# Altium PCB S5161 V1.1B.PcbDoc
Units mil, origin at the board's own origin, x right, y up, seen from the top; angles counter-clockwise.
Board outline 601 x 800 mil, 4 copper layers (Top, GND, VM, Bottom), stack 30.534 mil thick; 30 components, 38 nets, 118 pads, 60 vias.
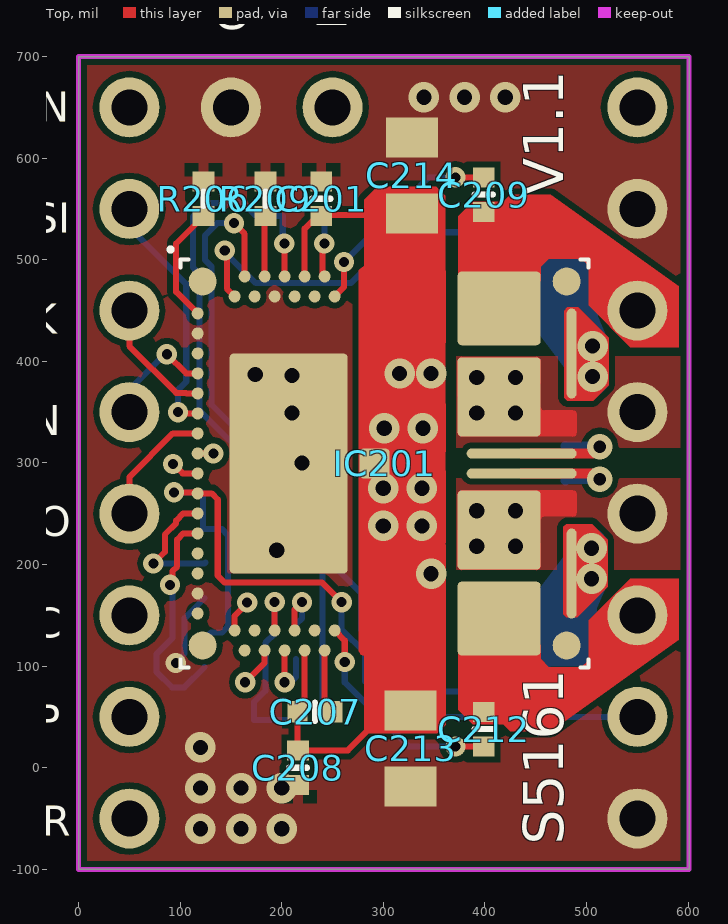
[diagram p0: Top view]
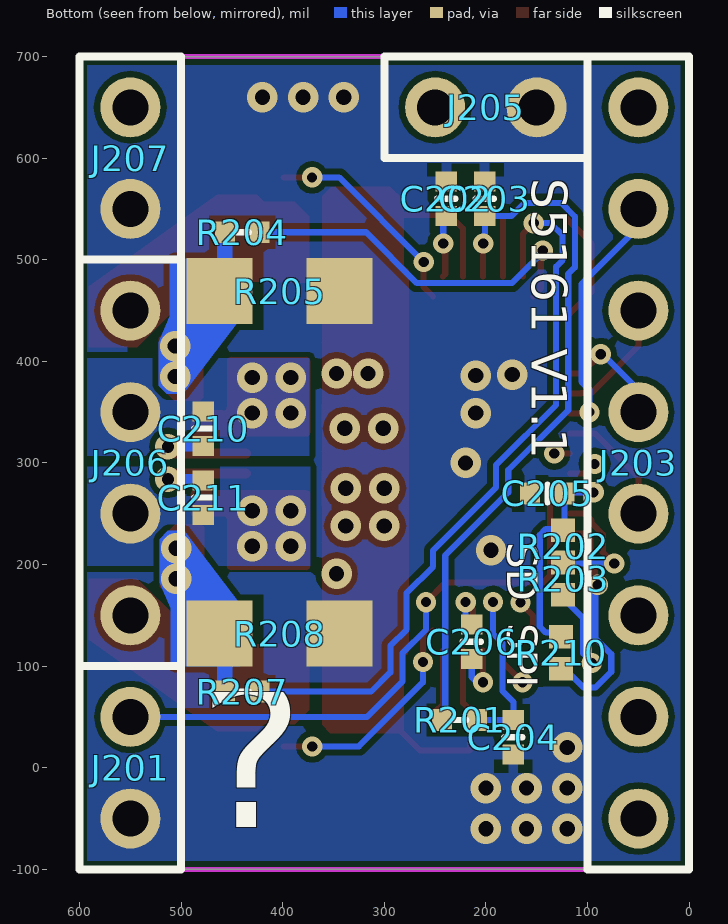
[diagram p1: Bottom view, seen from below]
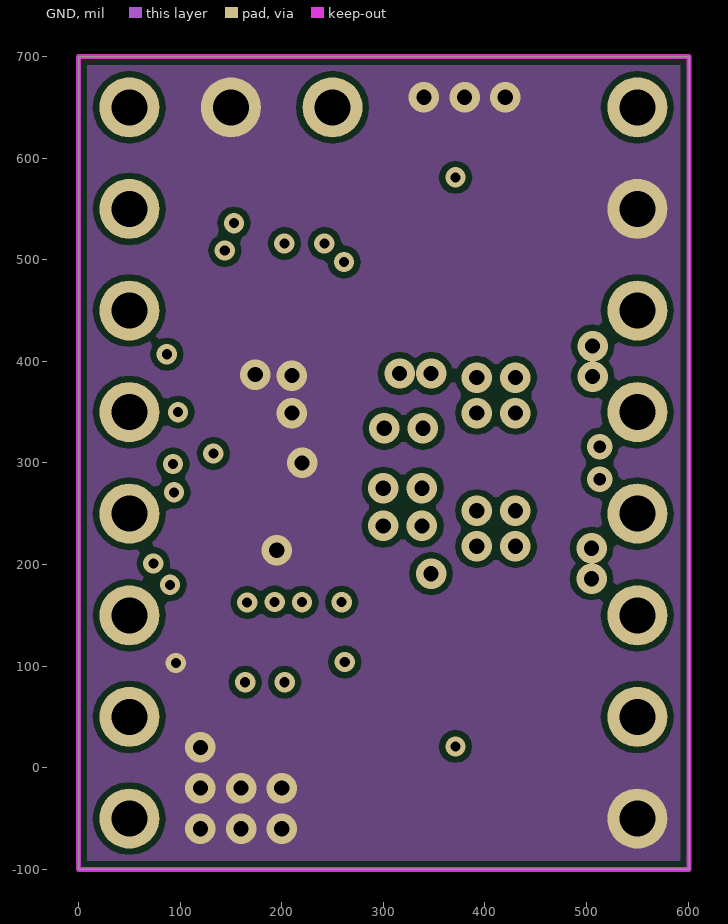
[diagram p2: GND]
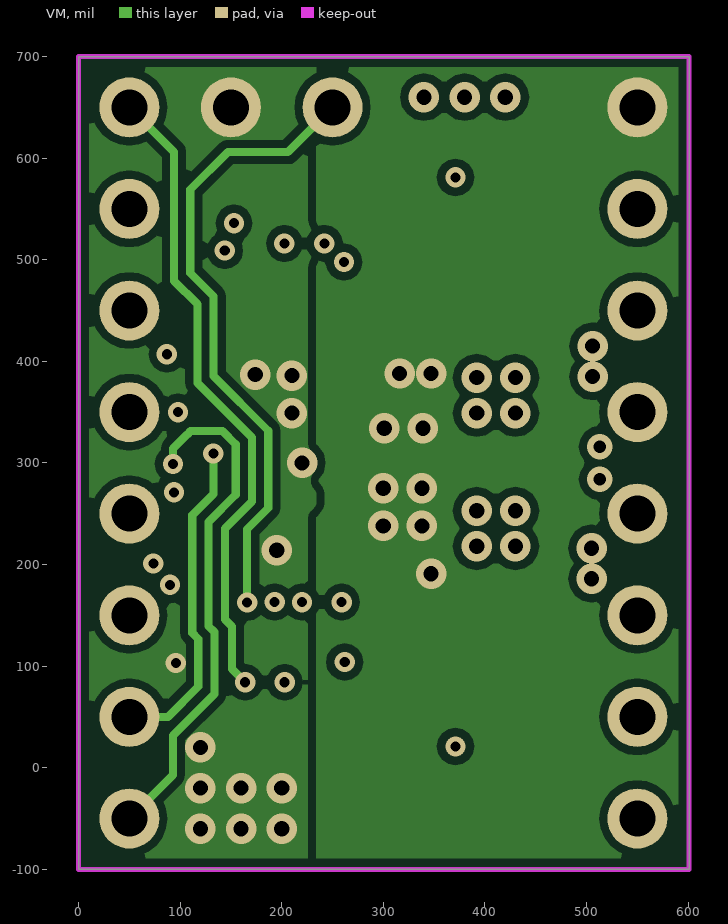
[diagram p3: VM]
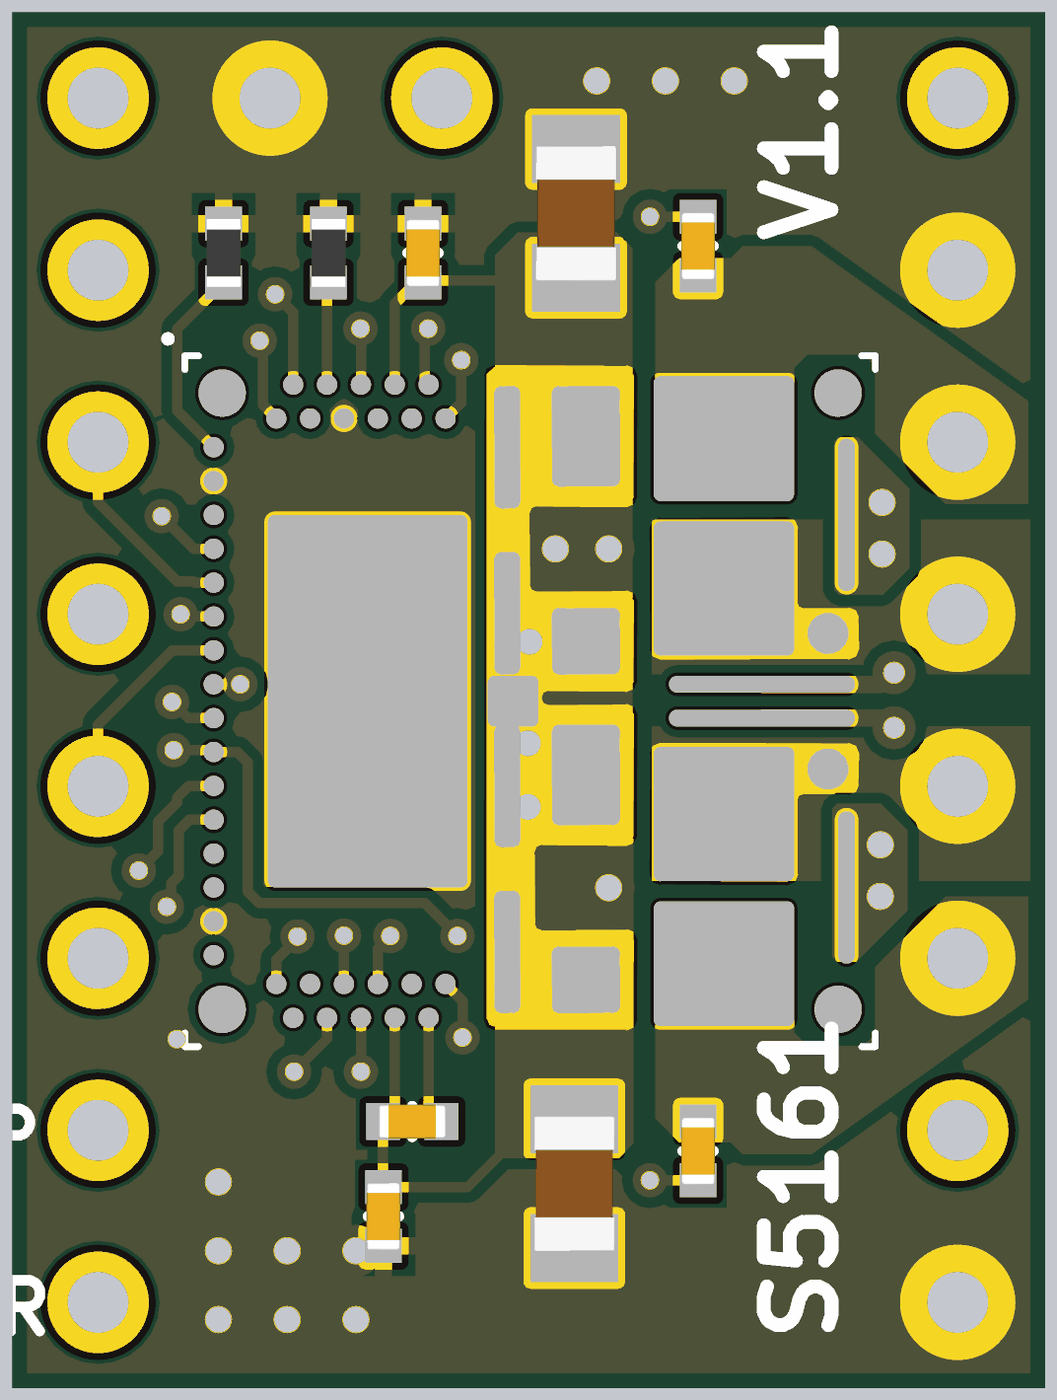
[diagram p4: 3D render of the assembled board from above, using the file's embedded part models]
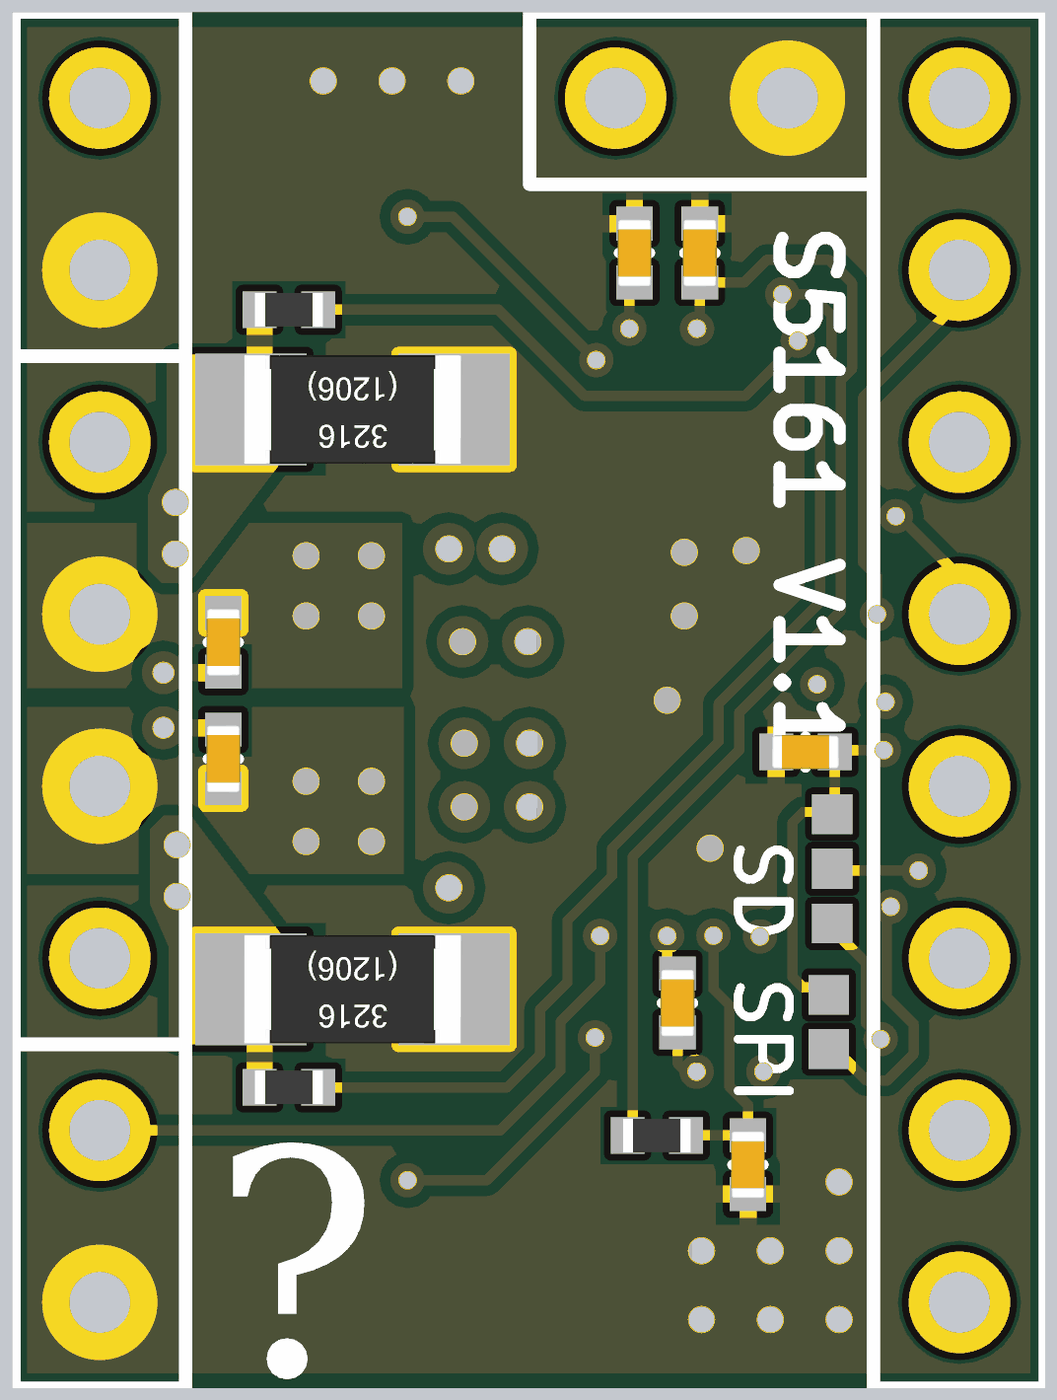
[diagram p5: 3D render of the assembled board from below, using the file's embedded part models]

## Layer stack, top to bottom
Solder Mask Top: solder mask 0.4, Solder Resist, Dk 3.5
Top: signal copper 1.35
Dielectric 1: core 10, FR-4, Dk 4.2
GND: signal copper 1.417
Dielectric 3: prepreg 5, Dk 4.2
VM: signal copper 1.417
Dielectric 2: core 10, Dk 4.2
Bottom: signal copper 1.35
Solder Mask Bottom: solder mask 0.4, Solder Resist, Dk 3.5

## Board outline
0,-100 601,-100 601,700 0,700

## Design rules (kind name [scope] priority, off if disabled: settings)
Clearance Clearance_1 [OnLayer('VM')] p1: gap=8 ignorepadtopadclearanceinfootprint=TRUE
Clearance [All] p2: gap=6 ignorepadtopadclearanceinfootprint=TRUE
ComponentClearance "ComponentClearance - Default - DEFAULT" [All] p1: gap=7.87 collisioncheckmode=3 verticalgap=10 showdistances=FALSE
FanoutControl Fanout_Small [(CompPinCount < 5)] p2: bgadir=Out bgaviamode=Centered fanoutstyle=Auto fanoutdirection=OutThenIn viagrid=1 // Fanout_Small (Default Rule)
FanoutControl Fanout_LCC [IsLCC] p4: bgadir=Out bgaviamode=Centered fanoutstyle=Auto fanoutdirection=Alternating viagrid=1 // Fanout_LCC (Default Rule)
HoleToHoleClearance "HoleToHoleClearance - Default - DEFAULT" [All] p1: gap=7.87 allowstackedmicrovias=TRUE
Length "Default Length" [All] p1: maxlimit=50000 minlimit=0
MaxMinImpedance "Default Impedance" [All] p1: minimum=50.00 maximum=150.0
ParallelSegment "Default Parallel Segment Same Layer" [All] p1: limit=1000 gap=200
ParallelSegment "Default Parallel Segment Adjasent" [All] p2: limit=1000 gap=200
PlaneClearance "PlaneClearance - FootPrint 'HEADER-1X2_V_2.54AA'" [HasFootprint('HEADER-1X2_V_2.54AA')] p1: clearance=19.68 // PAD - Power Plane Clearance
PlaneClearance "PlaneClearance - FootPrint 'HEADER-1X2_V_2.54A'" [HasFootprint('HEADER-1X2_V_2.54A')] p2: clearance=19.68 // PAD - Power Plane Clearance
PlaneClearance "PlaneClearance - FootPrint 'HEADER-1X2_V_2.54'" [HasFootprint('HEADER-1X2_V_2.54')] p3: clearance=19.68 // PAD - Power Plane Clearance
PlaneClearance "PlaneClearance - FootPrint 'HEADER-1X5_V_2.54'" [HasFootprint('HEADER-1X5_V_2.54')] p4: clearance=19.68 // PAD - Power Plane Clearance
PlaneClearance "PlaneClearance - FootPrint 'HEADER-1X4_V_2.54'" [HasFootprint('HEADER-1X4_V_2.54')] p5: clearance=19.68 // PAD - Power Plane Clearance
PlaneClearance "PlaneClearance - FootPrint 'HEADER-1X3_V_2.54'" [HasFootprint('HEADER-1X3_V_2.54')] p6: clearance=19.68 // PAD - Power Plane Clearance
PlaneConnect "PlaneConnect - FootPrint 'HEADER-1X5_V_2.54'" [HasFootprint('HEADER-1X5_V_2.54')] p1: planeconnectstyle=Direct reliefexpansion=7.87 reliefentries=4 reliefconductorwidth=11.81 reliefairgap=11.81
PlaneConnect "PlaneConnect - FootPrint 'HEADER-1X2_V_2.54A'" [HasFootprint('HEADER-1X2_V_2.54A')] p2: planeconnectstyle=Direct reliefexpansion=7.87 reliefentries=4 reliefconductorwidth=11.81 reliefairgap=0
PlaneConnect "PlaneConnect - FootPrint 'HEADER-1X2_V_2.54'" [HasFootprint('HEADER-1X2_V_2.54')] p3: planeconnectstyle=Direct reliefexpansion=7.87 reliefentries=4 reliefconductorwidth=11.81 reliefairgap=11.81
PlaneConnect "PlaneConnect - FootPrint 'HEADER-1X2_V_2.54AA'" [HasFootprint('HEADER-1X2_V_2.54AA')] p4: planeconnectstyle=Direct reliefexpansion=15.75 reliefentries=4 reliefconductorwidth=11.81 reliefairgap=0
PlaneConnect "PlaneConnect - FootPrint 'HEADER-1X4_V_2.54'" [HasFootprint('HEADER-1X4_V_2.54')] p5: planeconnectstyle=Direct reliefexpansion=15.75 reliefentries=4 reliefconductorwidth=11.81 reliefairgap=11.81
PlaneConnect "PlaneConnect - FootPrint 'HEADER-1X3_V_2.54'" [HasFootprint('HEADER-1X3_V_2.54')] p6: planeconnectstyle=Direct reliefexpansion=15.75 reliefentries=4 reliefconductorwidth=11.81 reliefairgap=11.81
PlaneConnect "Default PlaneConnect" [All] p7: planeconnectstyle=Direct reliefexpansion=20 reliefentries=4 reliefconductorwidth=7.87 reliefairgap=10
PolygonConnect PolygonConnect_3 [HasFootprint('RES0402_NS')] p1: connectstyle=Relief reliefconductorwidth=10 reliefentries=4 polygonreliefangle="90 Angle" airgapwidth=8
PolygonConnect PolygonConnect_2 [InNet('B2')] p2: connectstyle=Direct reliefconductorwidth=10 reliefentries=4 polygonreliefangle="90 Angle" airgapwidth=10
PolygonConnect PolygonConnect_1 [InNet('A1')] p3: connectstyle=Direct reliefconductorwidth=10 reliefentries=4 polygonreliefangle="90 Angle" airgapwidth=10
PolygonConnect [HasFootprint('CAP0402_NS')] p4: connectstyle=Relief reliefconductorwidth=10 reliefentries=4 polygonreliefangle="90 Angle" airgapwidth=8
PolygonConnect "PolygonConnect - FootPrint 'HEADER-1X5_V_2.54'" [HasFootprint('HEADER-1X5_V_2.54')] p5: connectstyle=Relief reliefconductorwidth=11.81 reliefentries=4 polygonreliefangle="45 Angle" airgapwidth=11.81
PolygonConnect "PolygonConnect - FootPrint 'HEADER-1X2_V_2.54A'" [HasFootprint('HEADER-1X2_V_2.54A')] p6: connectstyle=Direct reliefconductorwidth=11.81 reliefentries=4 polygonreliefangle="45 Angle" airgapwidth=10
PolygonConnect "PolygonConnect - FootPrint 'HEADER-1X2_V_2.54'" [HasFootprint('HEADER-1X2_V_2.54')] p7: connectstyle=Relief reliefconductorwidth=11.81 reliefentries=4 polygonreliefangle="45 Angle" airgapwidth=11.81
PolygonConnect "PolygonConnect - Default SMT" [IsSMTPin] p8: connectstyle=Direct reliefconductorwidth=7.87 reliefentries=4 polygonreliefangle="45 Angle" airgapwidth=10
PolygonConnect "PolygonConnect - FootPrint 'HEADER-1X4_V_2.54'" [HasFootprint('HEADER-1X4_V_2.54')] p9: connectstyle=Direct reliefconductorwidth=11.81 reliefentries=4 polygonreliefangle="45 Angle" airgapwidth=11.81
PolygonConnect "PolygonConnect - FootPrint 'HEADER-1X3_V_2.54'" [HasFootprint('HEADER-1X3_V_2.54')] p10: connectstyle=Relief reliefconductorwidth=11.81 reliefentries=4 polygonreliefangle="45 Angle" airgapwidth=11.81
PolygonConnect "PolygonConnect - FootPrint 'HEADER-1X2_V_2.54AA'" [HasFootprint('HEADER-1X2_V_2.54AA')] p11: connectstyle=Direct reliefconductorwidth=11.81 reliefentries=4 polygonreliefangle="45 Angle" airgapwidth=10
PolygonConnect "PolygonConnect - Default Pad" [All] p12: connectstyle=Direct reliefconductorwidth=7.87 reliefentries=4 polygonreliefangle="45 Angle" airgapwidth=10
RoutingLayers "RoutingLayers - Default - DEFAULT" [All] p1: top layer_v5=TRUE mid layer 1_v5=TRUE mid layer 2_v5=TRUE bottom layer_v5=TRUE
RoutingPriority "RoutingPriority - Default - DEFAULT" [All] p1: routingpriority=3
RoutingTopology "Default Routing Topology" [All] p1: topology=Shortest
RoutingVias "RoutingVias - Default - DEFAULT" [All] p1: holewidth=10 width=20 viastyle="Through Hole" minholewidth=10 minwidth=20 maxholewidth=20 maxwidth=40
SMDToCorner "SMDToCorner - Default - DEFAULT" [All] p1: distance=78740
SolderMaskExpansion [All] p1: expansion=4
Width [All] p1: maxlimit=100 minlimit=5 preferedwidth=6
21 further rules are at their usual default settings.

## Classes and differential pairs
net class ClearanceClass_2(RuleSet): +VM A1 A2 B1 B2 CA1 CA2 CB1 CB2 CPI CPO VCP

## Components (designator, comment, footprint, x,y, rotation, side; value= is the part's Value field where it differs from the comment)
C201 "C0805" CAP0402_NS 239,560 r270 top
C202 "C0603" CAP0402_NS 239,560 r270 bottom
C203 "C0603" CAP0402_NS 201,560 r270 bottom
C204 "C0603" CAP0402_NS 173,30 r90 bottom
C205 "C0603" CAP0402_NS 139.55,269.92 r180 bottom
C206 "C0603" CAP0402_NS 214,124 r270 bottom
C207 "C0805" CAP0402_NS 232.78,55.12 r0 top
C208 "C0805" CAP0402_NS 216,0 r90 top
C209 "C0603" CAP0402_NS 399,564 r90 top
C210 "C0603" CAP0402_NS 478.16,333.69 r270 bottom
C211 "C0603" CAP0402_NS 478.16,265.88 r90 bottom
C212 "C0603" CAP0402_NS 399,38 r270 top
C213 "C1210" CAP0805 327,19 r90 top
C214 "C1210" CAP0805 328,583 r270 top
IC201 "QFN42L" QFN42L 301.3,299.45 r270 top locked
J201 "HEADER-1X2_V_2.54A" HDR1X2 550,50 r270 bottom locked
J203 "HEADER-1X5_V_2.54" HDR1X8 50,650 r270 bottom locked
J205 "HEADER-1X2_V_2.54" HDR1X2 150,650 r0 bottom locked
J206 "HEADER-1X4_V_2.54" HDR1X4 550,450 r270 bottom locked
J207 "HEADER-1X2_V_2.54A" HDR1X2 550,650 r270 bottom locked
R201 "R0603" RES0402_NS 226,47 r0 bottom
R202 "R0603" JUMPER_0402_NS 124,218 r90 bottom
R203 "R0603" JUMPER_0402_NS 124,186 r90 bottom
R204 "R0603" RES0402_NS 440,527 r180 bottom
R205 "R2512" R1206 403,469 r0 bottom
R206 "R0603" RES0402_NS 123,560 r270 top
R207 "R0603" RES0402_NS 440,75 r180 bottom
R208 "R2512" R1206 403,132 r0 bottom
R209 "R0603" RES0402_NS 184,560 r270 top
R210 "R0603" JUMPER_0402_NS 126,113 r90 bottom

## Footprints (in the part's own frame and the unit in brackets; to place one, negate y for a bottom-side part, rotate by r counter-clockwise, add the part's x,y. Pads: shape width x height; smd on the part's side, far side on the other; paste and mask are expansions set on the pad)
CAP0402_NS [mm]
  rect 0.5x0.54 smd: 1(-0.433,0) 2(0.433,0)
  silkscreen extent 0,-0.23 0,0.23, body extent -0.5,-0.25 0.5,0.25, height 0.5
CAP0805 [mm]
  rect 1x1.3 smd: 1(-0.95,0) 2(0.95,0)
  body extent -1,-0.6 1,0.6, height 1.2
HDR1X2 [mm] "Connector; Header; 2 Position"
  round 1.5 hole 0.9: 1(0,0) 2(2.54,0)
  silkscreen extent -1.27,-1.27 3.81,1.27
HDR1X4 [mm] "Connector; Header; 4 Position"
  round 1.5 hole 0.9: 1(0,0) 2(2.54,0) 3(5.08,0) 4(7.62,0)
  silkscreen extent -1.27,-1.27 8.89,1.27
HDR1X8 [mm] "Connector; Header; 8 Position"
  round 1.5 hole 0.9: 1(0,0) 2(2.54,0) 3(5.08,0) 4(7.62,0) 5(10.16,0) 6(12.7,0) 7(15.24,0) 8(17.78,0)
  silkscreen extent -1.27,-1.27 19.05,1.27
JUMPER_0402_NS [mm]
  rect 0.584x0.6 smd: 1(-0.4,0) 2(0.4,0)
QFN42L [mm]
  round 0.3 smd mask+0.05: 1(-4.175,-1.25) 2(-4.675,-1.5) 3(-4.175,-1.75) 4(-4.675,-2) 5(-4.175,-2.25) 6(-4.675,-2.5) 7(-4.175,-2.75) 8(-4.675,-3) 9(-4.175,-3.25) 10(-4.675,-3.5) 11(-4.175,-3.75) 12(-3.75,-4.675) 13(-3.25,-4.675) 14(-2.75,-4.675) 15(-2.25,-4.675) 16(-1.75,-4.675) 17(-1.25,-4.675) 18(-0.75,-4.675) 19(-0.25,-4.675) 20(0.25,-4.675) 21(0.75,-4.675) 22(1.25,-4.675) 23(1.75,-4.675) 24(2.25,-4.675) 25(2.75,-4.675) 26(3.25,-4.675) 27(3.75,-4.675) 28(4.175,-3.75) 29(4.675,-3.5) 30(4.175,-3.25) 31(4.675,-3) 32(4.175,-2.75) 33(4.675,-2.5) 34(4.175,-2.25) 35(4.675,-2) 36(4.175,-1.75) 37(4.675,-1.5) 38(4.175,-1.25)
  rrect100% 0.25x2.75 smd mask+0.05: CA1(0.25,3.425) CB2(-0.25,3.425)
  rrect7% 5.5x2.95 smd mask+0.05: GNDP(0,-2.4)
  rrect10% 1.98x2.075 smd mask+0.05: OA1(1.665,2.863) OB2(-1.665,2.863)
  rrect11% 1.845x2.075 smd mask+0.05: OA2(3.878,2.863) OB1(-3.878,2.863)
  rrect100% 2.25x0.25 smd mask+0.05: RSA(2.75,4.675) RSB(-2.75,4.675)
  rrect27% 0.75x0.75 smd mask+0.05: VM(0,-0.25)
  round 0.7 smd mask+0.05: X1(-4.55,4.55) X2(-4.55,-4.55) X3(4.55,-4.55) X4(4.55,4.55)
  Top region: 4.808,1.425 4.777,1.502 4.7,1.533 4.7,1.525 3.525,1.533 3.448,1.502 3.417,1.425 3.425,1.425 3.433,0.125 3.402,0.048 3.325,0.017 3.325,0.025 2.175,0.017 2.098,0.048 2.067,0.125 2.075,0.125 2.083,1.425 2.052,1.502 1.975,1.533 1.975,1.525 0.2,1.533 0.123,1.502 0.092,1.425 0.1,1.425 0.108,0.225 0.077,0.148 0,0.117 0,0.125 -0.1,0.117 -0.177,0.148 -0.208,0.225 -0.2,0.225 -0.192,1.425 -0.223,1.502 -0.3,1.533 -0.3,1.525 -1.475,1.533 -1.552,1.502 -1.583,1.425 -1.575,1.425 -1.567,0.05 -1.598,-0.027 -1.675,-0.058 -1.675,-0.05 -2.825,-0.058 -2.902,-0.027 -2.933,0.05 -2.925,0.05 -2.917,1.425 -2.948,1.502 -3.025,1.533 -3.025,1.525 -4.8,1.533 -4.877,1.502 -4.908,1.425 -4.9,1.425 -4.908,-0.525 -4.877,-0.602 -4.8,-0.633 -4.8,-0.625 4.7,-0.633 4.777,-0.602 4.808,-0.525 4.8,-0.525 4.8,1.425
  Top region: -1.333,4.7 -1.302,4.777 -1.225,4.808 -1.225,4.8 -0.775,4.808 -0.698,4.777 -0.667,4.7 -0.675,4.7 -0.667,1.925 -0.698,1.848 -0.775,1.817 -0.775,1.825 -2.555,1.817 -2.632,1.848 -2.663,1.925 -2.655,1.925 -2.663,3.8 -2.632,3.877 -2.555,3.908 -2.555,3.9 -1.425,3.892 -1.348,3.923 -1.317,4 -1.325,4 -1.325,4.7
  Top region: 1.333,4.7 1.302,4.777 1.225,4.808 1.225,4.8 0.775,4.808 0.698,4.777 0.667,4.7 0.675,4.7 0.667,1.925 0.698,1.848 0.775,1.817 0.775,1.825 2.555,1.817 2.632,1.848 2.663,1.925 2.655,1.925 2.663,3.8 2.632,3.877 2.555,3.908 2.555,3.9 1.425,3.892 1.348,3.923 1.317,4 1.325,4 1.325,4.7
  silkscreen extent -5.4,-5.4 5.1,5.1, body extent -5,-4.98 5,5, height 0.8
R1206 [mil]
  rect 65x65 smd: 1(-59.06,0) 2(59.06,0)
  body extent -63,-31 63,31, height 22
RES0402_NS [mm]
  rect 0.5x0.54 smd: 1(-0.433,0) 2(0.433,0)
  silkscreen extent -0.18,0 0.18,0, body extent -0.5,-0.25 0.5,0.25, height 0.5

## Via types
v1: diameter 30, hole 15, Top to Bottom, tented both sides, 36 vias
v2: diameter 20, hole 10, Top to Bottom, tented both sides, 22 vias
v3: diameter 25, hole 12, Top to Bottom, tented both sides, 2 vias

## Nets (pads, with @x,y where several pads share a name; then routed paths per layer and width w, separated by ;. In a path a pad name is that pad's centre, name@x,y a point inside that pad or via, vN(x,y) a via of type N, cw(c..) or ccw(c..) an arc to the next point about the centre after c; other vN are vias at no path point)
5VOUT: C203.2 IC201.6 R201.2 | length 704.1
  Top w6: IC201.6 v2@202.88,510.88
  Bottom w6: v2(202.63,516) 201,517.63 C203.2 175.03,542.97 162,556 126,556 112.53,542.53 112.53,492.47 119,486 119,352.03 178,293.03 178,271 240,209 240,50.05 R201.2
12VOUT: C202.2 IC201.2 | length 64.4
  Top w6: v2@240,513 240,485.75 IC201.2
  Bottom w6: v2(242,516) C202.2@242,549.97
$3N3575: 
+VCC_IO: C205.2 IC201.21 J201.1 R202.2 R210.2 | length 830.9
  Top w6: v2@92.45,269.92 93.53,271 v2(94,271) 116.17,271 IC201.21 131.08,269.92 137,264 137,189 143.82,182.18 239.82,182.18 v2(259,163)
  Bottom w6: v2(94,271) 121.44,271 C205.2 122.52,236.53 124,235.05 140.95,235.05 147,229 147,139 141.05,133.05 130.3,133.05 R210.2 ; v2(259,163) 259,136 282,113 282,85 317,50 J201.1
+VM: C201.2 C207.1 C208.2 C213.2 C214.2 IC201.4 IC201.35 IC201.VM J207.1 | length 352.1
  Top w6: C207.1@213.72,55.12 222.56,63.97 IC201.35 ; C207.1 215.72,17.31 C208.2 265.03,17.03 304.4,56.4 C213.2@309,56.4 ; IC201.4 222.56,530.53 236,543.97 308.37,543.97 C214.2@310,545.6
  other v1: 347,191 300,238 338,238 300,275 338,275 301,334 339,334 316,388 347,388
A1: C211.1 IC201.OA1 J206.3
  other v1: 392,217.9 430,217.9 392,252.9 430,252.9
A2: C212.1 IC201.OA2 J206.4
B1: C209.1 IC201.OB1 J206.1
B2: C210.1 IC201.OB2 J206.2
  other v1: 392,349 430,349 392,384 430,384
CA1: C211.2 IC201.CA1 | length 115.5
  Top w10: IC201.CA1 508.39,289.61 v3@514,284
  Bottom w10: C211.2@479.16,282.92 480.24,284 v3@514,284
  other v3: 513,284
CA2: C212.2 IC201.38 | length 218.3
  Top w6: IC201.38 262,125.17 v2(262,104) ; v2(370.97,20.97) C212.2
  Bottom w6: v2(262,104) 262,84 325.03,20.97 v2(370.97,20.97)
CB1: C209.2 IC201.1 | length 209.9
  Top w6: IC201.1 261.25,472.98 v2(261.25,497.69) ; v2(371.03,581.03) C209.2
  Bottom w6: v2(261.25,497.69) 344.59,581.03 v2(371.03,581.03)
CB2: C210.2 IC201.CB2 | length 113.7
  Top w10: IC201.CB2 506.29,309.29 v3(513,316)
  Bottom w10: C210.2@479.16,316.65 479.81,316 v3(513,316)
CLK16: IC201.14
CPI: C206.1 IC201.34 | length 57.4
  Top w6: IC201.34 212.72,155.72 v2(220,163) v2@222,163
  Bottom w6: C206.1 220,147.06 v2(220,163)
CPO: C206.2 IC201.33 | length 54.2
  Top w6: v2@202.88,92.12 IC201.33
  Bottom w6: v2(202.88,84.12) 208.87,84.12 214,89.25 C206.2
DIAG0: IC201.28 J205.2 | length 651.9
  Top w6: IC201.28 153.67,149.34 v2@166,161.68
  VM w8: v2(166,162.68) 166,234.75 186.71,255.45 186.71,331.66 133,385.37 133,464 110,487 110,569 147,606 206,606 J205.2
ENCA: IC201.25
ENCB: IC201.24
ENCN: IC201.27
GND: C201.1 C202.1 C203.1 C204.1 C205.1 C208.1 C213.1 C214.1 IC201.7 IC201.13 IC201.26 IC201.GNDP J201.2 J205.1 J207.2 R203.1 R205.1 R206.1 R208.1 R209.1 | length 74.6
  Bottom w6: v2@96.82,105 104.37,112.55 104.37,147.23 R203.1@124,166.86 ; C205.1 C205.1@157.69,271
  other v1: 120,-60 160,-60 200,-60 120,-20 160,-20 200,-20 120,20 195,214 220,300 210,349 210,386 174,387 340,660 380,660 420,660
  other v2: 95.82,103
MISO: IC201.18 J203.5 | length 121
  Top w6: J203.5 50,286 92.98,328.98 IC201.18
MOSI: IC201.17 J203.2 | length 242.1
  Top w6: v2@101.66,348.66 IC201.17
  Bottom w6: J203.2 50,532 106,476 106,380 99.66,373.66 98,372 v2(98,350)
REFL/STEP: IC201.19 J203.7 | length 336.1
  Top w6: IC201.19 v2(132.71,309.29)
  VM w8: J203.7 88,50 117.82,79.82 117.82,126.83 112,132.65 112,248.63 132.71,269.34 v2(132.71,309.29)
REFR/DIR: IC201.20 J203.8 | length 534.1
  Top w6: v2(93,299) 102.39,289.61 IC201.20
  VM w8: J203.8 93,-7 93,31.86 133.82,72.68 133.82,133.46 128,139.28 128,242 154.71,268.71 154.71,318.4 141.82,331.29 110.4,331.29 107.11,328 106.75,328 93,314.25 v2(93,299)
RSA: IC201.RSA R207.1 R208.2 | length 70.4
  Bottom w15: R207.1 457.05,109.94 R208.2@482.11,135
  other v1: 505,186 505,216
RSB: IC201.RSB R204.1 R205.2 | length 68.8
  Bottom w15: R204.1 457.05,494.95 R205.2@483,469
  other v1: 506,385 506,415
SCK: IC201.16 J203.3 | length 121.6
  Top w6: J203.3 50,415 96,369 105.87,369 106.52,368.35 IC201.16
SD_MODE: IC201.22 R202.1 R203.2 | length 127.5
  Top w6: v2(73.69,201) 85,212.31 85,229.54 96,240.54 96,243.25 102.98,250.24 IC201.22
  Bottom w6: v2(73.69,201) 89,201 88.95,200.95 124,200.95 R203.2@125,201.95
SPI_MODE: IC201.23 R210.1 | length 225.3
  Top w6: v2(90,180) 92.69,182.69 92.69,193.69 97,198 97,224.57 102.98,230.55 IC201.23
  Bottom w6: v2(90,180) 92.37,177.63 92.37,127.53 76.69,111.85 76.69,94.31 92,79 104.05,79 R210.1@124,98.95
SRAH: IC201.10 R207.2 | length 721.3
  Top w6: v2(153,536) 163.51,525.49 IC201.10
  Bottom w6: v2@147,536 136.53,536 124.53,524 124.53,499.6 131,493.13 131,357 190,298 190,275.97 252,213.97 252,198 278,172 278,136 294,120 294,93.97 312.97,75 R207.2
SRAL: IC201.8 R209.2 | length 59.8
  Top w6: IC201.8 183.19,542.15 R209.2
SRBH: IC201.11 R204.2 | length 365.3
  Top w6: v2@142,509 142.6,509 146,505.6 146,471.48 IC201.11
  Bottom w6: v2@142,509 142.6,509 174.6,477 268,477 318,527 R204.2
  other v2: 144,509
SRBL: IC201.12 R206.2 | length 115.9
  Top w6: IC201.12 96,468.33 96,515.95 R206.2
VCC: C204.2 IC201.32 R201.1 | length 190.6
  Top w6: IC201.32 v2@193.04,165
  Bottom w6: v2(193.02,163.18) 193.02,132.02 183.88,122.88 183.88,75.71 172.92,64.75 172.92,46.95 C204.2 R201.1@208.92,47.03
VCP: C207.2 IC201.37 | length 63.4
  Top w6: IC201.37 242.25,62.69 C207.2
~CS: IC201.15 J203.4 | length 114.4
  Top w6: v2@87,409 v2(87,407) 105.97,388.03 IC201.15
  Bottom w6: J203.4 50,372 v2@87,409
~DRV_EN: IC201.31 J203.1 | length 674.4
  Top w6: v2(164,84.12) 183.19,103.32 IC201.31
  VM w8: J203.1 94,606 94,479.22 117,456.22 117,378.74 170.71,325.03 170.71,262.08 144,235.37 144,145.91 151.02,138.89 151.02,97.1 v2(164,84.12)
pads on no net: IC201.3 IC201.5 IC201.9 IC201.29 IC201.30 IC201.36 IC201.X1 IC201.X2 IC201.X3 IC201.X4 J203.6

## Polygon pours and split planes (outlines as drawn)
GND on Bottom "NONET_L01_P-001" (solid, pour order 16): 0,700 0,-100 601,-100 601,700
A1 on Bottom "NONET_L01_P-001" (solid, pour order 10): 373.08,198.95 373.08,296 603,296 603,198.95
B2 on Bottom "NONET_L01_P-001" (solid, pour order 6): 374.08,403.05 374.08,307 604,307 604,403.05
GND on Top "NONET_L01_P-001" (solid, pour order 12): 0,702 0,-98 601,-98 601,702
A1 on Top "NONET_L01_P-001" (solid, pour order 8): 372,195 372,285 605,285 605,195
B2 on Top "NONET_L01_P-001" (solid, pour order 4): 372,405 372,315 605,315 605,405
GND on VM "NONET_L01_P-001" (solid, pour order 18): 0,700 0,-100 234,-100 234,700
+VM on VM "NONET_L01_P-001" (solid, pour order 14): 601,700 601,-100 234,-100 234,700
GND on GND "NONET_L01_P-001" (solid, pour order 20): 0,700 0,-100 601,-100 601,700

## Keep-outs
Keep-Out Layer:
  the board outline again, w5

## Other copper
Top:
  region net B1: 465,564 425,564 418,557 388,557 374,543 374,477 455,479 455,493 463,501 495,501 502,494 502,455 543,414 591,414 591,474
  region net RSA: 477,237 480,239.84 505.57,239.84 521,224.41 521,178 491,148 480,148 477,151
  region net +VM: 281,558.87 294,571.87 352,571.87 361,562.87 361,221.13 360.42,220.55 361.34,219.63 361.34,42.21 353,33.87 282,33.87 281,34.87 281,110.1 276,114.79 276,489.68 281,494.06
  region net A2: 465,36 425,36 418,43 388,43 374,57 374,123 455,121 455,107 463,99 495,99 502,106 502,145 543,186 591,186 591,126
  region net RSB: 478,364 481,361.16 506.57,361.16 522,376.59 522,423 492,453 481,453 478,450
Bottom:
  region net RSB: 522,419 511,444.14 511,497 507,501 443,501 443,440.26 498,368 514,368 522,376
  region net RSA: 521,182 510,156.86 510,104 506,100 442,100 442,160.75 497,233 513,233 521,225

## Silkscreen, mask and mechanical layers (free items; w line width, h text height)
Silkscreen Top:
  text "DIAG0" at 264,727 h29.53 r90
  text "GND" at 166,724 h29.53 r90
  text "VM" at 636.04,638.22 h29.53
  text "DRV_ENN" at -202,636 h29.53
  text "V1.1" at 477,563 h39.37 r90
  text "GND" at 636.04,537.76 h29.53
  text "MOSI" at -112.73,526.53 h29.53
  text "B1" at 636.04,437.3 h29.53
  text "SCK" at -101.49,426.91 h29.53
  text "B2" at 636.04,336.84 h29.53
  text "CSN" at -101.49,327.28 h29.53
  text "A1" at 636.04,236.38 h29.53
  text "MISO" at -112.03,227.66 h29.53
  text "A2" at 636.04,135.92 h29.53
  text "NC" at -75.06,128.03 h29.53
  text "VCC_IO" at 636.04,45.3 h29.53
  text "REFL/STEP" at -231.38,32.63 h29.53
  text "GND" at 636.04,-65 h29.53
  text "REFR/DIR" at -197.36,-67 h29.53
  text "S5161" at 477,-76 h39.37 r90
  text "12..36V / 3.5A (rms)" at 16,-194 h39.37
  text "S5161 V1.1" at 141,-277 h39.37
Silkscreen Bottom:
  text "S5161 V1.1" at 155,580 h35 r90
  text "SD" at 179,222 h30 r90
  text "SPI" at 179,142 h30 r90
  text "?" at 483,-108 h260
Drill Drawing:
  region: 414,557 420,563 447.07,563 591,484 591,414 543,414 502,455 502,487.61 480,501 463,501 455,493 455,477 374,477 374,543 388,557